# Altium PCB PCB1.PcbDoc (part 2 of 2)
Units mm, origin at the board's own origin, x right, y up, seen from the top; angles counter-clockwise.
Board outline 62 x 97.84 mm, 6 copper layers (Top Layer, +5V, Signal Layer 1, Signal Layer 2, +3.3V, Bottom Layer), stack 1.231 mm thick; 82 components, 61 nets, 315 pads, 76 vias.
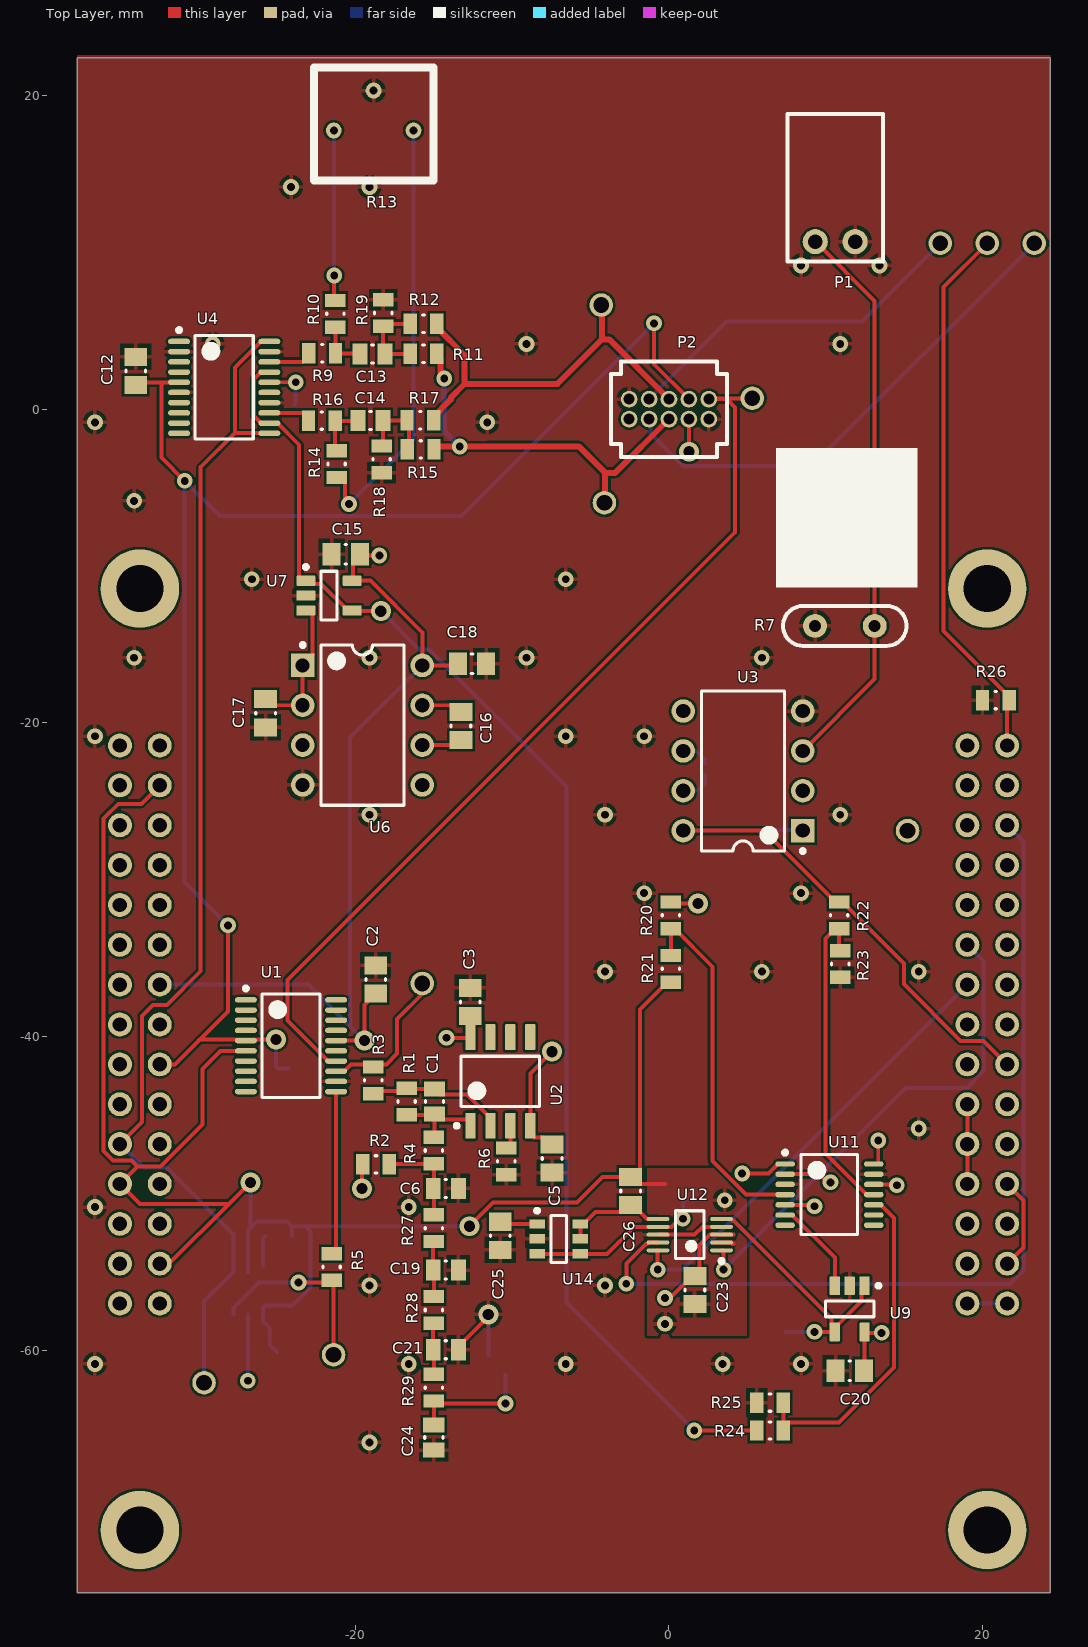
[diagram p0: Top Layer view]

## Via types
v1: diameter 1/1/1/1 (per signal layer), hole 0.5, Top Layer to Bottom Layer, 38 vias
v2: diameter 1, hole 0.5, Top Layer to Bottom Layer, 28 vias
v3: diameter 1.27, hole 0.711, Top Layer to Bottom Layer, 10 vias

## Nets (pads, with @x,y where several pads share a name; then routed paths per layer and width w, separated by ;. In a path a pad name is that pad's centre, name@x,y a point inside that pad or via, vN(x,y) a via of type N, cw(c..) or ccw(c..) an arc to the next point about the centre after c; other vN are vias at no path point) (continued)
AGND: (continued)
  other v1: -19.083,-65.847 -36.583,-60.847 -16.583,-60.847 -6.583,-60.847 3.417,-60.847 8.417,-60.847 -19.083,-55.847 -4.083,-55.847 -36.583,-50.847 -16.583,-50.847 15.917,-45.847 -4.083,-35.847 5.917,-35.847 15.917,-35.847 -1.583,-30.847 8.417,-30.847 -19.083,-25.847 -4.083,-25.847 10.917,-25.847 -36.583,-20.847 -6.583,-20.847 -1.583,-20.847 -34.083,-15.847 -19.083,-15.847 -9.083,-15.847 5.917,-15.847 -26.583,-10.847 -6.583,-10.847 -34.083,-5.847 -36.583,-0.847 -11.583,-0.847 -29.083,4.153 -9.083,4.153 10.917,4.153 8.417,9.153 13.417,9.153 -24.083,14.153 -19.083,14.153
Analog_Mux_Out: U9.3 U11.6 | length 6.1
  Top Layer w0.254: U11.6 7.847,-51.356 10.568,-54.077 U9.3
Batt_1_Stat: P3.7
Batt_2_Stat: P3.9
Battery_1: P3.12
Battery_2: P3.16
BBB_PWR_SW: P4.3
BEAM: P2.1 TP3.1 U1.14 | length 59.7
  Top Layer w0.254: U1.14 -21.737,-41.544 -24.308,-38.973 -24.308,-36.373 4.216,-7.849 4.216,0.102 3.683,0.635 P2.1 2.565,0.66 5.283,0.66 TP3.1
"Beam Sync Demod Filter Out": C24.2 P5.1 R29.1 U11.5 | length 38.3
  Top Layer w0.254: C24.2 R29.1 -14.82,-63.373 v2(-10.414,-63.373) ; U11.5 7.415,-50.724 9.195,-50.724 v2(9.271,-50.8)
  Signal Layer 2 w0.254: v2(-10.414,-63.373) 2.718,-63.373 9.271,-56.82 v2(9.271,-50.8)
  Bottom Layer w0.254: v2(-10.414,-63.373) P5.1
"Beam Sync Demod Out": C1.2 R1.1 R4.2 U2.1 | length 5.7
  Top Layer w0.254: R1.1@-16.47,-44.978 -14.996,-44.978 C1.2 ; R4.2 -14.946,-46.354 -14.946,-44.978 -14.648,-45.276 -12.848,-45.276 -12.65,-45.474 U2.1
Beam_mod: R3.2 TP2.1 U1.13 | length 9.5
  Top Layer w0.254: U1.13 -20.687,-42.194 -20.253,-41.76 -18.956,-41.76 -18.011,-41.76 -17.323,-41.072 -17.323,-38.859 -15.723,-37.259 TP2.1
FB_CS0: P4.6 U12.9 | length 58.3
  Top Layer w0.254: v2(-2.719,-55.738) -2.719,-54.458 -1.467,-53.206 -1.394,-53.206 -1.296,-53.108 U12.9
  Bottom Layer w0.254: v2(-2.719,-55.738) 21.74,-55.738 22.59,-54.888 22.59,-27.557 P4.6
FB_MUX_A0: P3.27 U11.1 | length 45
  Top Layer w0.254: v2(4.66,-48.705) 6.347,-48.705 6.947,-48.106 U11.1
  Signal Layer 2 w0.254: P3.27 -33.488,-52.957 -16.469,-52.957 -12.217,-48.705 v2(4.66,-48.705)
FB_MUX_A1: P3.25 U11.14 | length 52.3
  Top Layer w0.254: U11.14 13.291,-48.106 13.335,-48.061 v2(13.335,-46.609)
  Signal Layer 2 w0.254: P3.25 -33.488,-50.417 -21.608,-50.417 -17.8,-46.609 v2(13.335,-46.609)
GND: C10.2 C23.2 C26.2 P3.4 P3.23 P3.28 P4.2 P4.19 P4.20 P4.21 P4.23 P4.24 P4.27 P4.28 R8.2 R21.1 R26.1 TP6.1 U1.6 U5.2 U5.4 U12.2 | length 195.4
  Top Layer w0.254: P3.28 -31.852,-54.458 -28.042,-50.648 ; P3.4 -33.625,-25.154 -35.095,-25.154 -36.028,-26.088 -36.028,-47.268 -35.419,-47.877 -34.254,-47.877 -33.871,-48.26 ; U1.6 -28.575,-40.894 -29.74,-42.059 -29.74,-45.599 -32.402,-48.26 -33.871,-48.26 ; v3(-26.67,-49.276) -28.042,-50.648 ; v3(-12.703,-52.073) -12.703,-52.044 -11.206,-50.547 -5.869,-50.547 -4.241,-48.92 C26.2 ; -0.241,-49.368 -1.998,-49.368 C26.2 ; R21.1 -0.106,-36.517 -1.848,-38.259 -1.848,-48.472 -2.296,-48.92 C26.2 ; C23.2 C23.2@1.905,-56.78 ; U12.2@2.754,-53.108 3.946,-53.108 4.044,-53.206 4.116,-53.206 ; P4.23 P4.19 ; TP6.1 17.504,7.785 17.504,-14.143 21.678,-18.317 R26.1 21.551,-18.669 P4.2 ; P4.28 22.59,-53.419 22.59,-50.417 P4.24 ; -33.871,-48.26 P3.23 -33.719,-50.648 -28.042,-50.648
  Signal Layer 1 w0.254: P4.27 P4.28 ; P4.23 P4.24 ; P4.19 P4.20
  Signal Layer 2 w0.254: P4.20 22.59,-43.259 22.59,-22.477 P4.2
  Bottom Layer w0.254: U5.2@-26.816,-54.985 U5.2 -26.816,-52.33 -26.67,-52.184 ; v3(-26.67,-49.276) -26.67,-52.184 ; C10.2 -25.442,-59.627 -25.442,-58.559 -25.866,-58.135 -25.866,-57.285 -25.718,-57.137 -23.995,-57.137 -22.833,-55.974 -22.833,-52.408 -23.168,-52.073 ; R8.2 R8.2@-24.028,-52.073 ; v3(-12.703,-52.073) -23.168,-52.073 ; -26.67,-52.184 -26.267,-51.782 -24.319,-51.782 R8.2@-24.028,-52.073 ; R8.2@-24.028,-52.073 -23.168,-52.073
  other v2: -0.254,-58.293 3.556,-50.419
NetC1_1: C1.1 R1.2 R3.1 U2.2 | length 7.9
  Top Layer w0.254: R3.1@-18.658,-43.459 -16.905,-43.459 R1.2 ; R1.2@-16.216,-43.278 -16.216,-43.313 -16.201,-43.328 C1.1 -14.598,-43.676 -12.873,-43.676 -11.38,-45.168 U2.2@-11.38,-45.468
NetC6_2: C6.2 R2.1 R4.1 R27.2 | length 6.1
  Top Layer w0.254: R2.1 -17.78,-48.094 R4.1 -14.986,-49.619 C6.2 -14.986,-49.695 R27.2
NetC7_1: C7.1 U3.7 | length 2.1
  Bottom Layer w0.254: U3.7 0.931,-24.299 1.856,-24.299 C7.1 ; C7.1@2.171,-23.834 2.304,-23.701 C7.1@2.304,-23.351
NetC7_2: C7.2 U3.6 | length 1.8
  Bottom Layer w0.254: U3.6 1.736,-21.783 2.304,-22.351 C7.2@2.304,-22.551
NetC13_1: C13.1 R11.2 R12.2 R19.2 | length 5.2
  Top Layer w0.254: R11.2 -16.522,3.505 C13.1 -18.212,3.619 R19.2 -18.048,5.436 R12.2
NetC13_2: C13.2 R9.1 R10.2 | length 3.1
  Top Layer w0.254: R10.2 -21.26,3.568 R9.1 C13.2@-19.85,3.556
NetC14_1: C14.1 R15.2 R17.2 R18.2 | length 5.2
  Top Layer w0.254: R18.2 -18.225,-2.262 C14.1 -16.598,-0.737 -16.573,-0.711 -16.573,-2.464 R15.2
NetC14_2: C14.2 R14.1 R16.2 | length 3.3
  Top Layer w0.254: R14.1@-21.285,-2.579 -21.273,-2.567 -21.273,-0.762 -19.85,-0.762 C14.2
NetC16_1: C16.1 U6.7 | length 2.6
  Top Layer w0.254: U6.7 -13.68,-18.872 C16.1
NetC16_2: C16.2 U6.6 | length 2.6
  Top Layer w0.254: U6.6 -13.578,-21.412 C16.2
NetC17_1: C17.1 U6.1 U6.2 U7.3 | length 8.6
  Top Layer w0.254: C17.1 -25.313,-18.872 U6.2 U6.1 -22.72,-15.709 -22.72,-14.372 ; -22.72,-14.372 U7.3@-22.72,-13.035
NetC19_2: C19.2 R27.1 R28.2 | length 3.5
  Top Layer w0.254: R28.2 -14.986,-54.902 C19.2 -15.024,-53.085 R27.1
NetC21_2: C21.2 R28.1 R29.2 | length 3.3
  Top Layer w0.254: R29.2 -14.986,-59.982 C21.2 -15.024,-58.292 R28.1
NetC25_2: C25.2 U14.1 | length 2.4
  Top Layer w0.254: C25.2 -10.606,-51.931 U14.1
NetP1_2: P1.2 R7.1 U3.3 | length 35.9
  Top Layer w0.254: U3.3 13.11,-17.2 13.11,6.88 P1.2
NetP3_13: P3.13
NetP6_1: P6.1 U9.1 U9.4 U12.5 | length 17.2
  Top Layer w0.254: U12.5 3.946,-51.608 4.044,-51.706 4.116,-51.706 10.37,-57.96 10.37,-58.343 U9.4@10.568,-58.541 ; v2(9.271,-58.801) 10.553,-58.801 U9.4 U9.4@10.568,-58.541 ; U9.1 12.27,-56.064 12.27,-56.839 U9.4@10.568,-58.541
  Bottom Layer w0.254: P6.1 v2(9.271,-58.801)
NetR6_2: R6.2 U2.3 | length 1.5
  Top Layer w0.254: R6.2 -10.11,-46.824 U2.3
NetR8_1: R8.1 U5.3 | length 1.9
  Bottom Layer w0.254: U5.3 -25.866,-52.847 R8.1
NetR9_2: R9.2 U4.18 | length 2.2
  Top Layer w0.254: U4.18 -23.334,3.008 R9.2@-23.308,3.034
NetR10_1: R10.1 R13.1 | length 10.7
  Top Layer w0.254: R10.1@-21.336,7.073 v2(-21.336,8.509)
  Bottom Layer w0.254: v2(-21.336,8.509) -21.349,8.522 -21.349,17.767 R13.1@-21.336,17.78
NetR13_3: R13.3 R14.2 | length 27.7
  Top Layer w0.254: R14.2 -20.959,-4.355 -20.661,-4.653 -20.661,-5.579 -20.396,-5.843 v2(-20.396,-6.045)
  Bottom Layer w0.254: v2(-20.396,-6.045) -16.281,-1.93 R13.3
NetR16_1: R16.1 U4.13 | length 2.2
  Top Layer w0.254: U4.13 -23.334,-0.242 R16.1@-23.308,-0.268
NetR24_1: R24.1 R25.2 U11.10 | length 21.8
  Top Layer w0.254: R25.2 R24.1 7.288,-64.863 7.586,-64.565 10.823,-64.565 14.327,-61.061 14.327,-51.536 13.497,-50.706 U11.10
PLATE_N: P2.6 R11.1 R15.1 TP9.1 | length 25.1
  Top Layer w0.254: R11.1@-15.096,3.161 R11.1@-14.567,3.161 ; -11.582,-2.385 -11.569,-2.372
  Top Layer w0.381: R15.1@-14.575,-2.385 -11.582,-2.385 ; R11.1@-14.567,3.161 -14.562,3.156 -14.562,2.36 -14.326,2.123 v2(-14.326,1.956) ; -11.569,-2.372 -5.756,-2.372 -4.064,-4.064 ; TP9.1@-4.089,-5.791 -4.064,-5.766 -4.064,-4.064 ; P2.6 -3.429,-4.064 -4.064,-4.064
  Bottom Layer w0.254: v2(-13.338,-2.385) v2@-13.29,-2.337
  Bottom Layer w0.381: v2(-14.326,1.956) -14.326,-1.397 -13.386,-2.337 v2@-13.29,-2.337
PLATE_P: P2.5 R12.1 R17.1 TP10.1 | length 26.3
  Top Layer w0.381: R17.1@-15.096,-1.126 -15.096,-0.582 -13.898,0.616 -13.898,0.733 -13.03,1.6 ; R12.1@-14.771,5.6 -14.771,5.185 -13.03,3.444 -13.03,1.6 ; TP10.1 -4.267,6.579 -4.267,4.445 ; P2.5 -3.81,4.445 -4.267,4.445 ; -13.03,1.6 -7.112,1.6 -4.267,4.445
PWM1A: P2.10 P4.7 TP11.1 | length 38.3
  Signal Layer 1 w0.254: P2.10 -2.54,-4.819 15.201,-22.56 TP11.1 16.814,-26.861 P4.7
PWM2A: P3.17
PWM2B: P3.21 TP8.1 U4.11 U4.20 U5.1 | length 77.9
  Top Layer w0.254: P3.21 -33.582,-45.431 -33.582,-38.662 -32.893,-37.973 -32.004,-37.973 -29.84,-35.809 -29.84,-3.703 -27.661,-1.524 ; U4.11 -25.489,-1.524 -27.661,-1.524 ; U4.20 -25.996,4.308 -27.661,2.643 -27.661,-1.524
  Bottom Layer w0.254: P3.21 -33.488,-48.339 -32.019,-48.339 -27.766,-52.592 -27.766,-54.985 -29.63,-56.849 TP8.1
PWM2B_DELAY: R5.1 TP4.1 U5.6 | length 12.2
  Top Layer w0.254: v2(-23.61,-55.652) -21.63,-55.652 R5.1 -21.375,-55.651 TP4.1
  Bottom Layer w0.254: U5.6 -27.766,-57.285 -26.133,-55.652 v2(-23.61,-55.652)
SINE_CS0: P3.22
SPI0_MISO: P4.11 U12.1 | length 31.6
  Top Layer w0.254: U12.1 3.479,-53.608 3.481,-53.61 v2(3.481,-54.838)
  Bottom Layer w0.254: v2(3.481,-54.838) 15.06,-43.259 18.979,-43.259 20.05,-42.188 20.05,-35.177 P4.11
SPI0_MOSI: P4.9
SPI0_SCLK: P4.13 U12.10 | length 28.5
  Top Layer w0.254: v2(-0.719,-54.838) -0.719,-53.61 -0.717,-53.608 U12.10
  Bottom Layer w0.254: v2(-0.719,-54.838) 0.851,-54.838 P4.13
Sync_clk: R5.2 U1.11 | length 10.5
  Top Layer w0.254: R5.2 -21.212,-53.534 U1.11
ZH: C8.1 P2.8 R20.2 TP5.1 U3.1 | length 87.7
  Top Layer w0.254: R20.2 0.202,-31.496 v3(1.854,-31.496)
  Signal Layer 2 w0.254: v3(1.854,-31.496) 3.894,-31.496 16.096,-19.294 16.096,3.377 TP5.1
  Bottom Layer w0.254: P2.8 -1.189,-0.716 -1.189,-1.549 0.892,-3.631 9.088,-3.631 TP5.1 ; C8.1@6.851,-26.831 8.495,-26.831 U3.1@8.516,-26.852
ZH_Reduced: R20.1 R21.2 U11.4 | length 23.2
  Top Layer w0.254: R21.2 R20.1 0.344,-33.113 2.768,-35.537 2.768,-47.912 4.912,-50.056 U11.4
ZP: C9.1 P2.7 P4.18 R22.2 TP7.1 U3.8 | length 84.7
  Top Layer w0.254: U3.8 6.063,-26.863 10.613,-31.413 11.063,-31.413 14.971,-35.321 14.971,-36.647 18.581,-40.257 20.05,-40.257 P4.18
  Signal Layer 2 w0.254: P2.7 -2.08,1.445 -2.876,1.445 -3.35,0.971 -3.35,-5.281 -3.088,-5.544 -3.088,-22.868 U3.8
  Bottom Layer w0.254: P2.7 3.676,5.581 12.3,5.581 TP7.1 ; U3.8 3.066,-26.863 C9.1
ZP_Reduced: R22.1 R23.2 U11.11 | length 20.4
  Top Layer w0.254: R23.2 10.838,-34.436 R22.1 10.613,-33.113 9.987,-33.739 9.987,-47.446 12.597,-50.056 U11.11
pads on no net: P3.1 P3.3 P3.5 P3.8 P3.10 P3.11 P3.15 P3.19 P3.20 P3.24 P3.26 P3.29 P3.30 P4.4 P4.5 P4.8 P4.10 P4.12 P4.14 P4.15 P4.16 P4.17 U1.1 U1.2 U1.3 U1.4 U1.7 U1.8 U1.9 U1.10 U1.15 U1.17 U1.18 U1.19 U1.20 U2.5 U2.6 U2.7 U3.2 U3.5 U4.1 U4.3 U4.4 U4.7 U4.8 U4.9 U4.10 U4.15 U6.3 U6.5 U11.7 U11.8 U11.9

## Polygon pours and split planes (outlines as drawn)
AGND on Bottom Layer "Bottom_GND" (solid, pour order 4): -37.719,22.562 -37.719,-75.438 24.281,-75.438 24.281,22.562
GND on Top Layer "GND_L01_P000" (solid, pour order 0): 4.953,-48.387 4.953,-59.055 -1.397,-59.055 -1.397,-58.166 -1.397,-48.387
AGND on Top Layer "Top_GND" (solid, pour order 2): -37.719,22.562 -37.719,-75.438 24.281,-75.438 24.281,22.562
AGND on Signal Layer 1 "Top_GND" (solid, pour order 6): -37.719,22.562 -37.719,-75.438 24.281,-75.438 24.281,22.562
GND on Signal Layer 2 "Top_GND" (solid, pour order 8): -37.719,22.562 -37.719,-75.438 24.281,-75.438 24.281,22.562
+5 on +5V (split plane): 23.771,21.892 23.771,-74.93 -37.211,-74.93 -37.211,21.892
+3.3 on +3.3V (split plane): 23.771,21.892 23.771,-74.93 -37.211,-74.93 -37.211,21.892

## Silkscreen, mask and mechanical layers (free items; w line width, h text height)
Top Overlay:
  rectangle: 6.805,-11.355 15.822,-2.465
Bottom Overlay:
  circle w0.1: c-11.481,-69.154 r4.663
  circle w0.254: c-11.481,-69.154 r5
  lines w0.127: -13.767,-70.602 -13.005,-69.84 -13.513,-69.078 -11.989,-69.84 -13.005,-68.57 -11.481,-69.332 -12.497,-68.062 -10.973,-68.824 -11.989,-67.554 -10.465,-68.316 -11.481,-67.046 -10.719,-67.554 -9.957,-66.792
  lines w0.254: -13.894,-71.11 -13.894,-70.094 ; -13.767,-70.602 -9.957,-70.602 -9.957,-66.792 ; -10.465,-66.665 -9.449,-66.665
  text "ZH Adjust Pot" at 14.983,20.444 h0.75
  text "TOP" at -7.087,19.914 h0.75
  text "Offset / Adjust" at -16.942,14.91 h0.75
  text "ZP" at 16.764,7.417 h0.75 r270
  text "ZH" at 22.758,7.188 h0.75 r270
  text "GND" at 19.761,6.833 h0.75 r270
  text "Plate P" at -6.604,6.121 h0.75
  text "Plate N" at -6.375,-6.553 h0.75
  text "Beam Mod Out" at -11.151,-33.223 h0.51
  text "Synch Demod Out" at -7.696,-55.626 h0.51
  text "ADC In" at 7.29,-62.433 h0.51
  text "LM-002" at 5.554,-66.844 h1.27
  text "Feedback" at 5.554,-68.749 h1.27
  text "REV E" at 5.554,-70.654 h1.27
  text "ZLS" at -10.465,-72.202 h1.2
  text "ZLS Corp" at 5.554,-72.559 h1.27
Mechanical 1:
  text "Top faces inward to center of meter" at 2.134,13.792 h0.51

## Dimensions
24.281,-75.441 to -37.722,-75.441 on Mechanical 13
-37.722,-75.441 to -37.722,22.403 on Mechanical 13
20.281,-11.438 to 20.281,-71.438 on Mechanical 13
20.281,-71.438 to -33.719,-71.438 on Mechanical 13
-33.719,-71.438 to -37.722,-75.441 on Mechanical 13
-37.722,-75.441 to -33.719,-71.438 on Mechanical 13
21.956,-71.468 to 21.551,-56.998 on Mechanical 13
-34.989,-56.998 to -33.719,-71.438 on Mechanical 13

## Text inside footprints (layer, text, board x,y; h text height)
P2: Mechanical 1 "J1" at 0.559,-3.708 h0.76 r180